# EAGLE board Toslink_Tool_V2 (EAGLE 9.5.2)
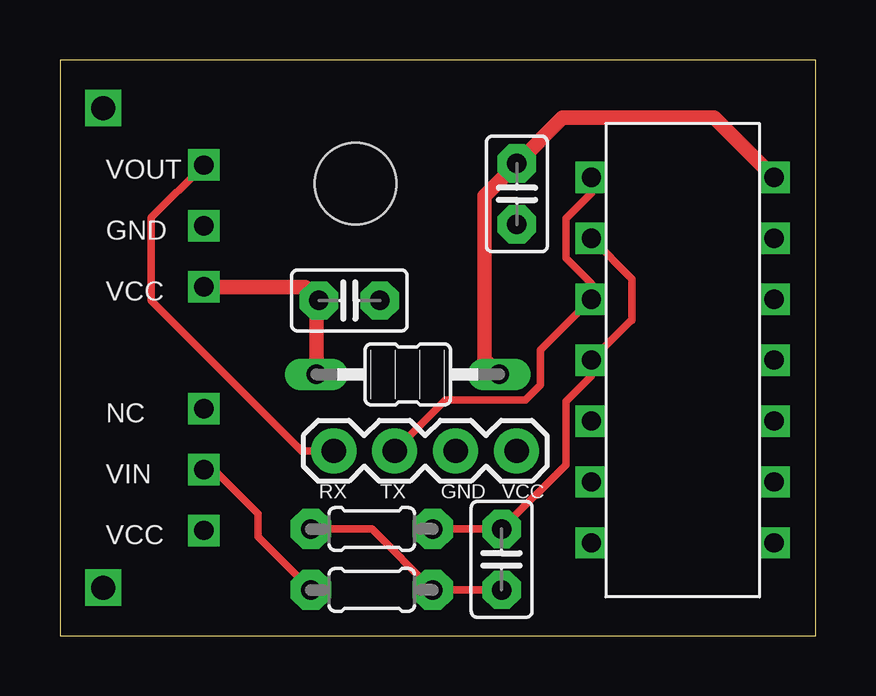
[diagram p0: board, top side]
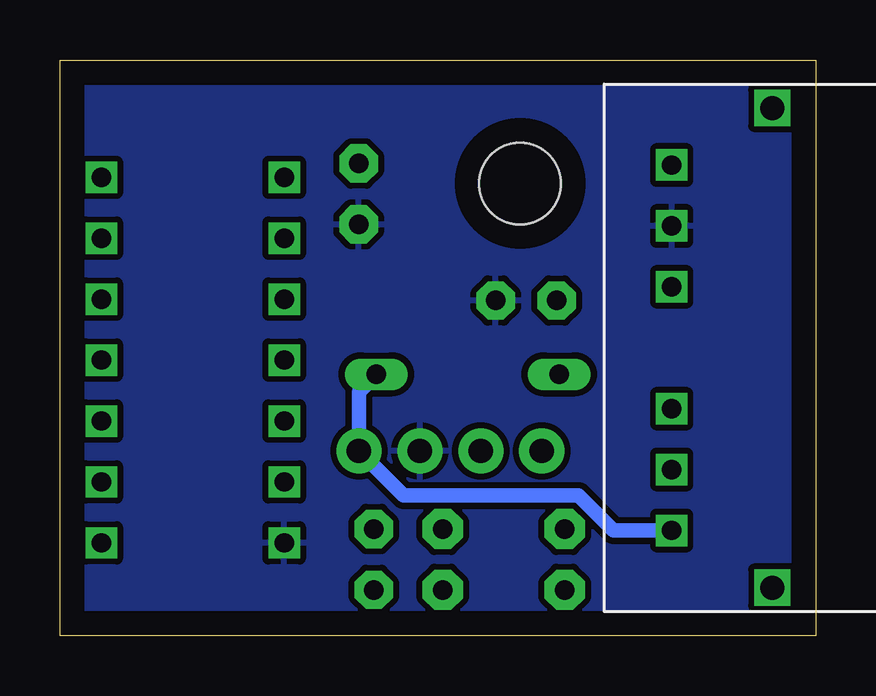
[diagram p1: board, bottom side, seen from below]

Size 31.5 x 24 mm. Coordinates in mm from the lower left corner, seen from the top.
Outline: 0,0 31.5,0 31.5,24 0,24 0,0
Copper layers (1*16): Top 0.035mm / dielectric 1.5mm / Bottom 0.035mm
Design rules "default *": minimum track width 6mil, minimum drill 0.35mm, track to track 10mil, track to pad 10mil, pad to pad 10mil, via to via 10mil, smd to smd 10mil, copper to edge 40mil, drill to drill 10mil, minimum pad ring 10mil, minimum via ring 8mil, stop-mask expansion 4mil, vias tented up to drill 0mil, thermal gap 10mil
Holes 3.4 mm at 12.32,18.85

## Footprints (pad centres in the part's own frame; a part is rotated, then mirrored left to right if it is on the bottom)
C2.5-2 = drill 0.813 pad 1.6 octagon: 1 -1.27,0; 2 1.27,0
1X04 = drill 1.016 pad 1.88: 1 0,0; 2 2.54,0; 3 5.08,0; 4 7.62,0
MMICC7 = drill 0.813 long: 1 -3.81,0; 2 3.81,0
0204/5 = drill 0.813 pad 1.676 octagon: 1 -2.54,0; 2 2.54,0
DIP14-P-300-2.54 = drill 0.8 square: 1A -3.81,7.62; 1Y -3.81,5.08; 2A -3.81,2.54; 2Y -3.81,0; 3A -3.81,-2.54; 3Y -3.81,-5.08; 4A 3.81,-5.08; 4Y 3.81,-7.62; 5A 3.81,0; 5Y 3.81,-2.54; 6A 3.81,5.08; 6Y 3.81,2.54; GND -3.81,-7.62; VCC 3.81,7.62
TODX2355(F) = drill 0.8 square: GND -5.08,0; NC3 2.54,0; VCC1 7.62,0; VCC2 -2.54,0; VIN 5.08,0; VOUT -7.62,0 | drill 1 square: NC1 -10,4.2; NC2 10,4.2

## Placement (x,y rotation side)
C1  0.1uF  [C2.5-2]  12.06,13.97 0 top
C2  47pF  [C2.5-2]  18.41,3.17 90 top
C3  0.1uF  [C2.5-2]  19.05,18.41 270 top
J1  [1X04]  11.41,7.7 0 top
L1  MMICC7  [MMICC7]  14.5,10.89 180 top
R1  270R  [0204/5]  13,1.91 180 top
R2  500R  [0204/5]  13,4.45 180 top
U$1  TC74HC04APF  [DIP14-P-300-2.54]  25.96,11.48 0 top
U$2  TODX2355(F)  [TODX2355(F)]  6,12 270 bottom

## Library data of the parts
C1-C3 = capacitor-wima
J1 = SparkFun-Connectors; PROD_ID: CONN-09696
L1 = inductors; SPICEPREFIX: L
R1 R2 = adafruit
U$1 U$2 = TOSLink_Transceiver

## Nets
GND: C1.2 C3.2 J1.3 U$1.GND U$2.GND
N$1: C1.1 L1.2 U$2.VCC2
N$2: R1.2 U$2.VIN
N$3: C2.1 R1.1 R2.2
RX: J1.1 U$2.VOUT
TX: J1.2 U$1.1A U$1.2A
VCC: C3.1 J1.4 L1.1 U$1.VCC U$2.VCC1
VIN: C2.2 R2.1 U$1.1Y U$1.2Y

## Tracks (layer width: path | path; a pad name or v marks a point on that pad's centre or on a via)
GND
  pour Bottom: -5.08,27.94 46.99,27.94 46.99,-2.54 -5.08,-2.54
N$1
  Top 0.61: L1.2 10.69,13.87 C1.1 10.22,14.54 U$2.VCC2
N$2
  Top 0.305: R1.2 8.26,4.11 8.26,5.08 6.42,6.92 U$2.VIN
N$3
  Top 0.305: R2.2 13,4.45 R1.1 C2.1
RX
  Top 0.305: J1.1 10.08,7.7 3.81,13.97 3.81,17.43 U$2.VOUT
TX
  Top 0.305: J1.2 16.08,9.82 19.41,9.82 20.04,10.45 20.04,11.91 U$1.2A 22.15,14.68 21.09,15.74 21.09,17.39 22.15,18.45 U$1.1A
VCC
  Top 0.61: U$1.VCC 27.29,21.59 20.95,21.59 C3.1 17.69,18.33 17.69,11.51 L1.1
  Bottom 0.61: L1.1 19.04,10.16 J1.4 17.18,5.84 9.88,5.84 8.42,4.38 U$2.VCC1
VIN
  Top 0.305: R2.1 C2.2 21.09,7.12 21.09,9.77 22.15,10.83 U$1.2Y 23.79,13.13 23.84,13.13 23.84,14.87 U$1.1Y

## Text on the board
tNames: VOUT | GND | VCC | NC | VIN | RX | TX | GND | VCC | VCC